# Altium PCB Rules for Pad и Via.PcbDoc
Units mm, origin at the board's own origin, x right, y up, seen from the top; angles counter-clockwise.
Board outline 50 x 31 mm, 2 copper layers (Top Layer, Top, Bottom Layer, Bottom); 31 components, 20 nets, 93 pads, 35 vias.
Unrouted connection lines stored in the file: 31.
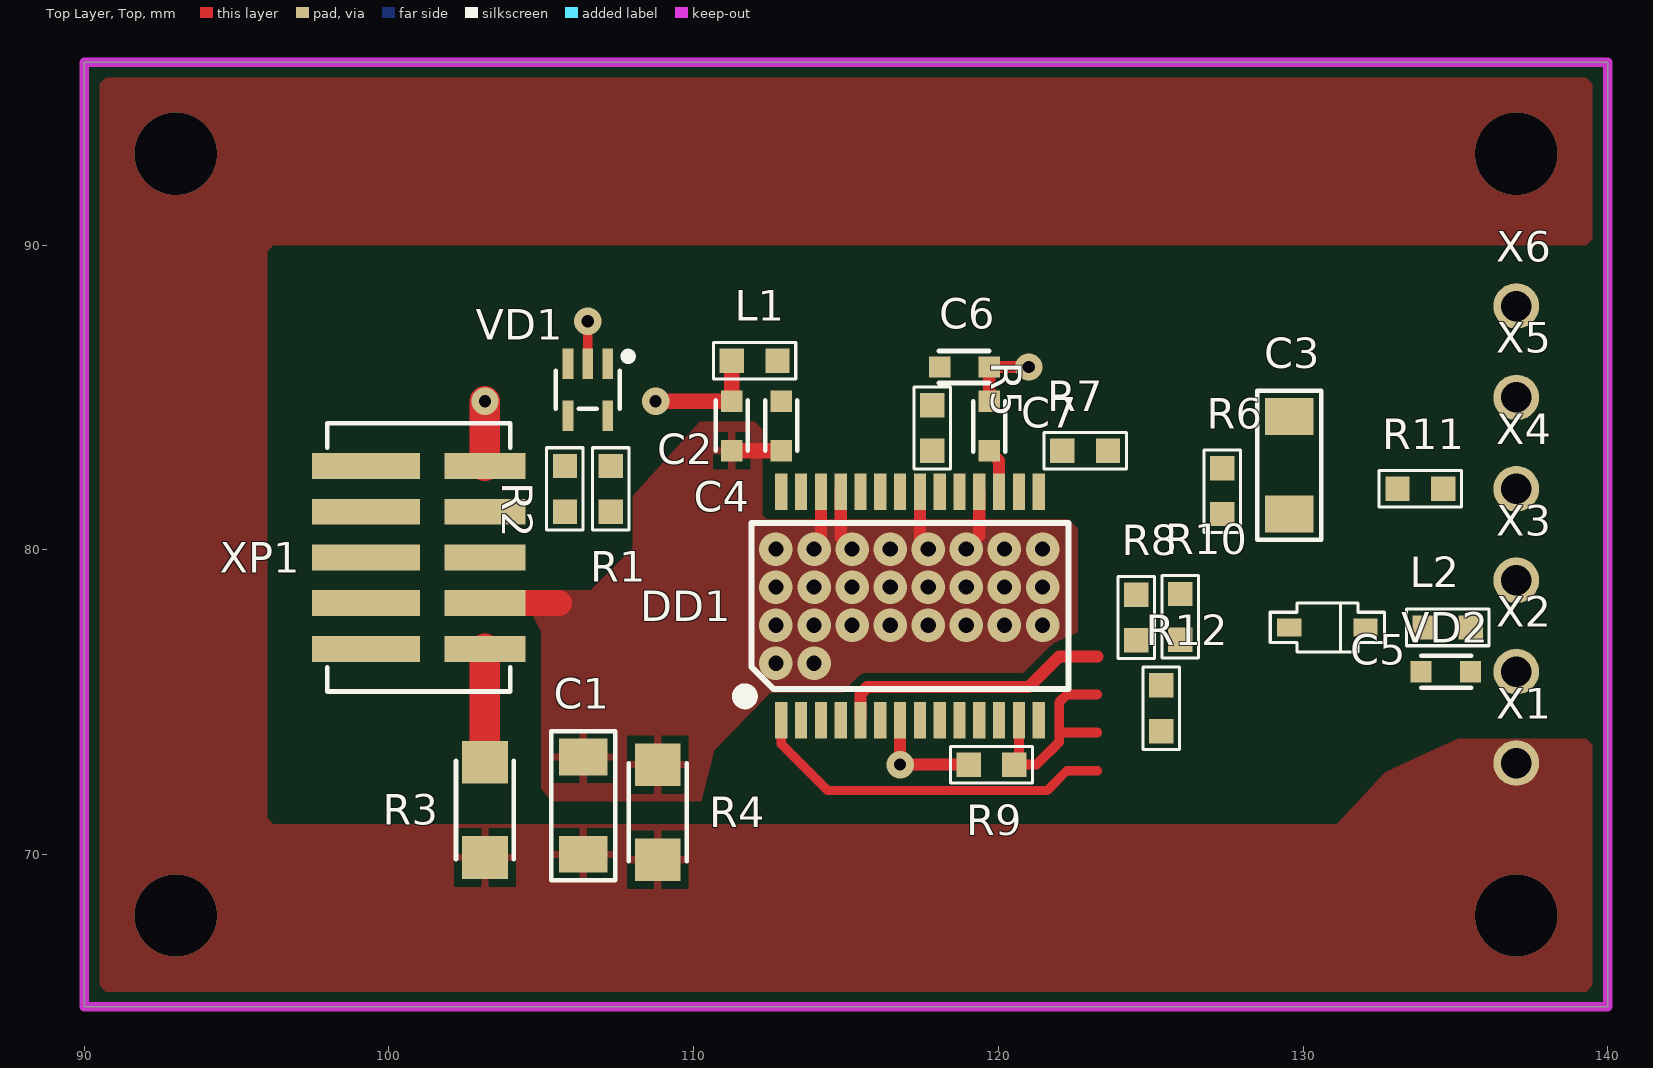
[diagram p0: Top Layer, Top view]
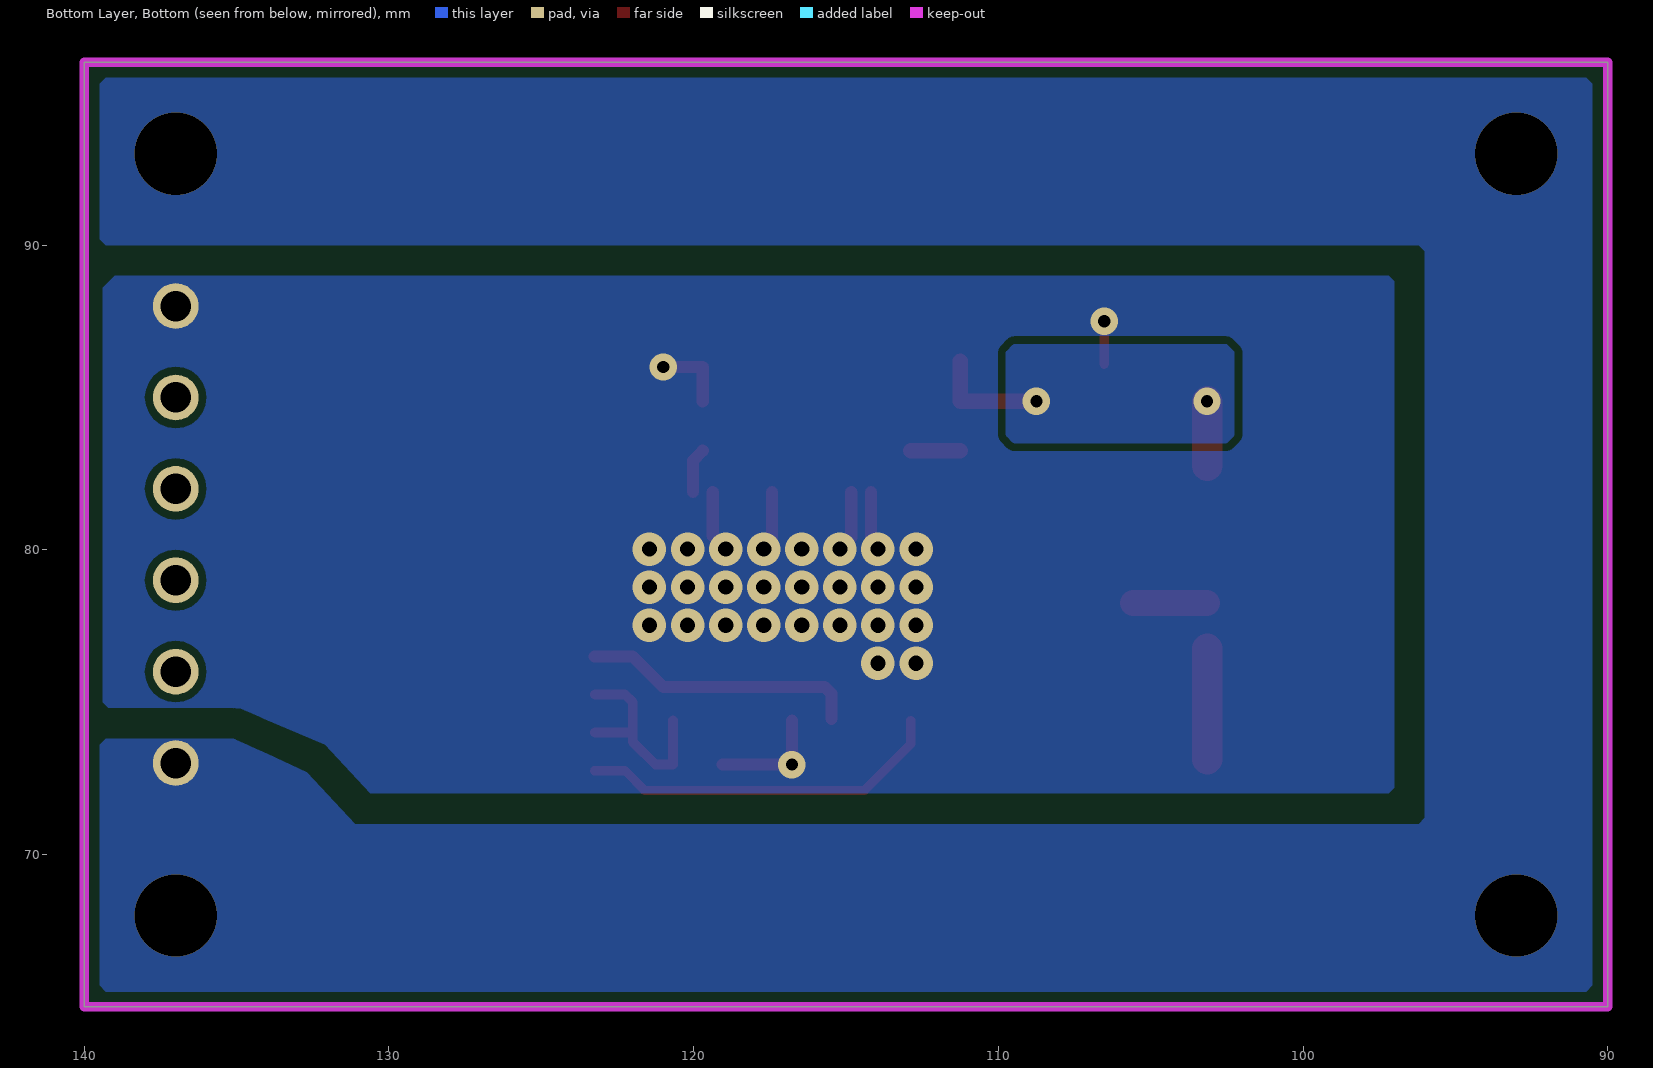
[diagram p1: Bottom Layer, Bottom view, seen from below]

## Layer stack, top to bottom
Top Solder, Top Mask: solder mask 0.0102, Solder Resist, Dk 3.5
Top Layer, Top: signal copper 0.0356
Dielectric 1: dielectric 0.32, FR-4, Dk 4.8
Bottom Layer, Bottom: signal copper 0.0356
Bottom Solder, Bot Mask: solder mask 0.0102, Solder Resist, Dk 3.5

## Board outline
90,65 140,65 140,96 90,96

## Design rules (kind name [scope] priority, off if disabled: settings)
Clearance ClearanceGNDvsCASE [(InNamedPolygon('Bottom Layer, Bottom-GND')) vs InNet('CASE')] p1: gap=1
Clearance ClearanceNetDA9_15 [(InNet('NetDA9_15') AND InPolygon)] p2: gap=0.15
Clearance ClearanceNetFU3 [(InNet('NetFU3_2') AND InPolygon)] p3: gap=0.15
Clearance ClearancePoly [InPolygon] p4: gap=0.25
Clearance Clearance_All [All] p5: gap=0.25
Clearance Clearance_Keepout [OnLayer('Keep-Out Layer')] p6: gap=1
DiffPairsRouting [All] p1: maxlimit=0.254 minlimit=0.254 mostfreqgap=0.254 toplayer_minwidth=0.254 toplayer_maxwidth=0.381 toplayer_prefwidth=0.381 bottomlayer_minwidth=0.254 bottomlayer_maxwidth=0.381 bottomlayer_prefwidth=0.381 maxuncoupledlength=12.7
Height [All] p1: minheight=0 maxheight=50 prefheight=12.7
HoleSize [All] p1 off: absolutevalues=TRUE maxlimit=10 minlimit=0.025 maxpercent=80.000 minpercent=20.000
HoleToHoleClearance [All] p1 off: gap=0.254 allowstackedmicrovias=FALSE
LayerPairs [All] p1 off: enforce=TRUE
MinimumSolderMaskSliver [All] p1 off: minsoldermaskwidth=0.15
NetAntennae [All] p1 off: netantennaetolerance=0
PlaneConnect [All] p1: planeconnectstyle=Direct reliefexpansion=0.508 reliefentries=4 reliefconductorwidth=0.254 reliefairgap=0.254
PolygonConnect PolygonConnect_RoundPad [HasRoundHole vs InNet('CASE')   OR InNet('GND')] p1: connectstyle=Direct reliefconductorwidth=0.254 reliefentries=4 polygonreliefangle="90 Angle" airgapwidth=0.254
PolygonConnect PolygonConnect_VIA [ViaDiameter vs InNet('CASE')   OR InNet('GND')    OR InNet('VUSB')] p2: connectstyle=Direct reliefconductorwidth=0.254 reliefentries=4 polygonreliefangle="90 Angle" airgapwidth=0.254
PolygonConnect PolygonConnect_Sq_Pads [All vs (InPadClass('All Pads'))] p3: connectstyle=Relief reliefconductorwidth=0.254 reliefentries=4 polygonreliefangle="90 Angle" airgapwidth=0.254
PolygonConnect [HasRoundHole] p4: connectstyle=Direct reliefconductorwidth=0.254 reliefentries=4 polygonreliefangle="90 Angle" airgapwidth=0.254
RoutingVias [All] p1: holewidth=0.4 width=0.8 viastyle="Through Hole" minholewidth=0.3 minwidth=0.6 maxholewidth=0.6 maxwidth=1
SilkToBoardRegionClearance [All] p1 off:
SilkToSilkClearance [All] p1 off: silktosilkclearance=0.254
SilkToSolderMaskClearance [IsPad] p1 off: minsilkscreentomaskgap=0.05 clearancetoexposedcopper=TRUE
SolderMaskExpansion [All] p1: expansion=0.05
Width [All] p1: maxlimit=5 minlimit=0.2 preferedwidth=0.35
18 further rules are at their usual default settings.

## Classes and differential pairs
component class "КСФТ.468351.006Э3 - Модуль преобразователя USB-UART": A B C1 C2 C3 C4 C5 C6 C7 DD1 GND L1 L2 R1 R2 R3 R4 R5 R6 R7 R8 R9 R10 R11 R12 VD1 VD2 XP1

## Components (designator, comment, footprint, x,y, rotation, side; value= is the part's Value field where it differs from the comment)
C1 "CAP-N-1206" SMD_1206_CAP 106.375,71.6 r270 top
C2 "CAP-N-0603" SMD_0603_CAP 111.25,83.25 r90 top
C3 "CAP-N-1206" SMD_1206_CAP 129.55,82.775 r90 top
C4 "CAP-N-0603" SMD_0603_CAP 112.875,83.25 r90 top
C5 "CAP-N-0603" SMD_0603_CAP 133.875,76 r0 top
C6 "CAP-N-0603" SMD_0603_CAP 119.7,86 r180 top
C7 "CAP-N-0603" SMD_0603_CAP 119.7,84.875 r270 top
DD1 "FT232RL" SSOP-28 112.875,74.4 r180 top
L1 "L_0603" SMD_0603_IND 112,86.2 r270 top
L2 "L_0603" SMD_0603_IND 134.75,77.45 r270 top
R1 "R_0603" SMD_0603_RES 107.275,82 r0 top
R2 "R_0603" SMD_0603_RES 105.775,82 r0 top
R3 "R_1206" SMD_1206_RES 103.15,73.025 r270 top (schematic designator R11)
R4 "R_1206" SMD_1206_RES 108.825,72.95 r270 top (schematic designator R12)
R5 "R_0603" SMD_0603_RES 117.825,84 r0 top
R6 "R_0603" SMD_0603_RES 127.35,81.925 r180 top
R7 "R_0603" SMD_0603_RES 122.85,83.25 r90 top
R8 "R_0603" SMD_0603_RES 124.533,77.778 r0 top
R9 "R_0603" SMD_0603_RES 119.775,72.95 r90 top
R10 "R_0603" SMD_0603_RES 125.975,77.8 r0 top
R11 "R_0603" SMD_0603_RES 133.85,82 r270 top
R12 "R_0603" SMD_0603_RES 125.35,74.8 r0 top
VD1 "SP0504BAJT" SC70-5 106.525,86.1 r180 top
VD2 "BAT165" SOD-323_BAT165(Primary) 130.8,77.45 r270 top
X1 "MH_H1.0xP1.5" MH_H1.0xP1.5 137,73 r180 top
X2 "MH_H1.0xP1.5" MH_H1.0xP1.5 137,76 r180 top
X3 "MH_H1.0xP1.5" MH_H1.0xP1.5 137,79 r180 top
X4 "MH_H1.0xP1.5" MH_H1.0xP1.5 137,82 r180 top
X5 "MH_H1.0xP1.5" MH_H1.0xP1.5 137,85 r180 top
X6 "MH_H1.0xP1.5" MH_H1.0xP1.5 137,88 r180 top
XP1 "87438-0543" Molex87437 99.25,82.75 r0 top

## Footprints (in the part's own frame and the unit in brackets; to place one, negate y for a bottom-side part, rotate by r counter-clockwise, add the part's x,y. Pads: shape width x height; smd on the part's side, far side on the other; paste and mask are expansions set on the pad)
MH_H1.0xP1.5 [mm]
  round 1.5 hole 1: 1(0,0)
Molex87437 [mm] "1.50mm (0.059\") Pitch Wire-to-Board Header 87437 Horizontal"
  rect 3.55x0.85 smd: 1(0,0) 2(0,-1.5) 3(0,-3) 4(0,-4.5) 5(0,-6)
  rect 2.65x0.85 smd: 1(3.9,0) 2(3.9,-1.5) 3(3.9,-3) 4(3.9,-4.5) 5(3.9,-6)
  silkscreen extent -1.27,-7.4 4.72,1.4
SC70-5 [mm]
  rect 0.35x1 smd: 1(-0.65,0) 2(0,0) 3(0.65,0) 4(0.65,1.7) 5(-0.65,1.7)
  silkscreen extent -1.45,-0.37 1.05,1.48, body extent -1.07,-0.32 1.08,2.03, height 1
SMD_0603_CAP [mm]
  rect 0.7x0.7 smd: 1(0,0) 2(1.625,0)
  silkscreen extent 0,-0.53 1.65,0.53, body extent 0,-0.4 1.6,0.4, height 0.55
SMD_0603_IND [mm]
  rect 0.8x0.8 smd: 1(0,-0.75) 2(0,0.75)
  silkscreen extent -0.6,-1.35 0.6,1.35, body extent -0.4,-0.8 0.4,0.8, height 0.9
SMD_0603_RES [mm]
  rect 0.8x0.8 smd: 1(0,-0.75) 2(0,0.75)
  silkscreen extent -0.6,-1.35 0.6,1.35, body extent -0.4,-0.8 0.4,0.8, height 0.9
SMD_1206_CAP [mm]
  rect 1.2x1.6 smd: 1(-1.6,0) 2(1.6,0)
  silkscreen extent -2.45,-1.05 2.45,1.05, body extent -1.6,-0.8 1.6,0.8, height 1.5
SMD_1206_RES [mm]
  rect 1.4x1.5 smd: 1(0,0) 2(3.125,0)
  silkscreen extent -0.05,-0.95 3.17,0.95, body extent 0,-0.8 3.2,0.8, height 0.65
SOD-323_BAT165(Primary) [mm]
  rect 0.6x0.8 smd: A(0,-1.25) C(0,1.25)
  silkscreen extent -0.8,-1.88 0.8,1.88, body extent -0.63,-0.85 0.63,0.85, height 1.1
SSOP-28 [mm]
  rect 0.4x1.2 smd: 1(0,0) 2(-0.65,0) 3(-1.3,0) 4(-1.95,0) 5(-2.6,0) 6(-3.25,0) 7(-3.9,0) 8(-4.55,0) 9(-5.2,0) 10(-5.85,0) 11(-6.5,0) 12(-7.15,0) 13(-7.8,0) 14(-8.45,0) 15(-8.45,-7.5) 16(-7.8,-7.5) 17(-7.15,-7.5) 18(-6.5,-7.5) 19(-5.85,-7.5) 20(-5.2,-7.5) 21(-4.55,-7.5) 22(-3.9,-7.5) 23(-3.25,-7.5) 24(-2.6,-7.5) 25(-1.95,-7.5) 26(-1.3,-7.5) 27(-0.65,-7.5) 28(0,-7.5)
  silkscreen extent -9.43,-6.48 1.39,-0.59, body extent -9.43,-7.73 0.97,0.23, height 1.95

## Part data
DD1: "USB to UART converter"
VD1: "Surface Mount TVS Diode Array"
XP1: "1.50mm (0.059\") Pitch Wire-to-Board Header 87437 Horizontal"

## Via types
v1: diameter 1.1, hole 0.5, Top Layer, Top to Bottom Layer, Bottom, 26 vias
v2: diameter 0.9, hole 0.4, Top Layer, Top to Bottom Layer, Bottom, 5 vias
v3: diameter 2.7, hole 2.7, Top Layer, Top to Bottom Layer, Bottom, 4 vias

## Nets (pads, with @x,y where several pads share a name; then routed paths per layer and width w, separated by ;. In a path a pad name is that pad's centre, name@x,y a point inside that pad or via, vN(x,y) a via of type N, cw(c..) or ccw(c..) an arc to the next point about the centre after c; other vN are vias at no path point)
3V3OUT: C7.2 DD1.17 R7.2 | length 1.5
  Top Layer, Top w0.4: C7.2 120.025,82.925 DD1.17
CASE: C1.2 R3.2 R4.2 X1.1
  other v3: 93,68 137,68 93,93 137,93
DM: DD1.16 R1.2 VD1.1
DP: DD1.15 R2.2 VD1.3
GND: C1.1 C2.1 C3.2 C4.1 C5.1 C6.1 C7.1 DD1.7 DD1.18 DD1.21 DD1.25 DD1.26 R4.1 R8.2 R9.2 VD1.2 X6.1 XP1.4@103.15,78.25 | length 17.7
  Top Layer, Top w0.32: VD1.2 v2@106.525,87.425
  Top Layer, Top w0.4: v1@114.175,80.25 DD1.26 ; v1@114.825,80.4 DD1.25 ; DD1.7 v2(116.775,72.95) R9.2 R9.2@119.05,72.95 ; v1@117.425,80.3 DD1.21 ; 119.375,80.45 DD1.18 ; C7.1 C6.1 v2(121,86)
  Top Layer, Top w0.5: C2.1 C4.1
  Top Layer, Top w0.85: XP1.4@103.15,78.25 105.575,78.25
  other v1: 112.7,76.275 113.95,76.275 112.7,77.525 113.95,77.525 115.2,77.525 116.45,77.525 117.7,77.525 118.95,77.525 120.2,77.525 121.45,77.525 112.7,78.775 113.95,78.775 115.2,78.775 116.45,78.775 117.7,78.775 118.95,78.775 120.2,78.775 121.45,78.775 112.7,80.025 113.95,80.025 115.2,80.025 116.45,80.025 117.7,80.025 118.95,80.025 120.2,80.025 121.45,80.025
  other v2: 106.525,87.5
NetL2_1: L2.1 VD2.C
NetR1_1: R1.1 XP1.2@103.15,81.25
NetR2_1: R2.1 XP1.3@103.15,79.75
NetR3_1: R3.1 XP1.5@103.15,76.75 | length 3.6
  Top Layer, Top w1: R3.1@103.15,73.125 XP1.5@103.15,76.75
R\E\S\E\T\: C6.2 DD1.19 R5.2
RX: R10.2 X3.1
RXD: DD1.5 R8.1 R10.1 | length 9.1
  Top Layer, Top w0.4: DD1.5@115.475,74.45 115.475,75.275 115.7,75.5 121,75.5 122,76.5 123.25,76.5
T/R\: R12.2 X5.1
TX: R11.2 X4.1
TXD: DD1.1 R11.1 | length 12.1
  Top Layer, Top w0.3: DD1.1 112.875,73.625 114.4,72.1 121.6,72.1 122.25,72.75 123.25,72.75
TXEN: DD1.13 R9.1 R12.1 | length 7
  Top Layer, Top w0.32: DD1.13 120.675,72.95 121.255,72.95 122,73.695 122,74 ; 123.25,74 122,74 ; 123.25,75.25 122.25,75.25 122,75 122,74
VCC: C3.1 C4.2 DD1.20 L1.2 R5.1 R6.2 VD2.A
VCC1: C5.2 L2.2 X2.1
VCCIO: DD1.4 R6.1 R7.1
VUSB: C2.2 L1.1 VD1.5 XP1.1@103.15,82.75 | length 6
  Top Layer, Top w0.5: v2(108.75,84.875) C2.2 L1.1
  Top Layer, Top w1: XP1.1@103.15,82.75 v2(103.15,84.875)
pads on no net: DD1.2 DD1.3 DD1.6 DD1.8 DD1.9 DD1.10 DD1.11 DD1.12 DD1.14 DD1.22 DD1.23 DD1.24 DD1.27 DD1.28 VD1.4 XP1.1@99.25,82.75 XP1.2@99.25,81.25 XP1.3@99.25,79.75 XP1.4@99.25,78.25 XP1.5@99.25,76.75

## Polygon pours and split planes (outlines as drawn)
VUSB on Bottom Layer, Bottom "Bottom Overlay-No Net" (solid, pour order 10): 102.25,86.5 102.5,86.75 109.5,86.75 109.75,86.5 109.75,83.75 109.5,83.5 102.5,83.5 102.25,83.75
GND on Bottom Layer, Bottom "Bottom Layer, Bottom-GND" (solid, pour order 5): 97,72.2 97.2,72 130.6,72 132.1,73.6 134.9,74.8 139.2,74.8 139.4,75 139.4,88.6 139,89 97.2,89 97,88.8
CASE on Bottom Layer, Bottom "Bottom Overlay-No Net" (solid, pour order 7): 139.3,95.5 90.7,95.5 90.5,95.3 90.5,65.7 90.7,65.5 139.3,65.5 139.5,65.7 139.5,73.6 139.3,73.8 135.1,73.8 133.991,73.303 132.7,72.7 131.1,71 96.2,71 96,71.2 96,89.8 96.2,90 139.3,90 139.5,90.2 139.5,95.3
CASE on Top Layer, Top "Bottom Overlay-No Net" (solid, pour order 6): 139.3,95.5 90.7,95.5 90.5,95.3 90.5,65.7 90.7,65.5 139.3,65.5 139.5,65.7 139.5,73.6 139.3,73.8 135.1,73.8 133.991,73.303 132.7,72.7 131.1,71 96.2,71 96,71.2 96,89.8 96.2,90 139.3,90 139.5,90.2 139.5,95.3
GND on Top Layer, Top "Bottom Overlay-No Net" (solid, remove dead copper, pour order 8): 101.825,78.675 101.825,77.825 104.725,77.825 105,77.3 105,72.15 105.35,71.75 110.25,71.75 110.675,73.425 112.5,75.3 114.9,75.3 115.075,75.475 115.175,75.6 115.35,75.775 115.525,75.9 115.675,75.925 120.8,75.925 121.8,76.925 122.6,77.3 122.6,80.7 122.3,81 112.4,81 112.25,81.15 112.25,83.95 112,84.2 110.2,84.2 108,81.75 108,80.05 106.625,78.675

## Keep-outs
Keep-Out Layer, Board:
  the board outline again, w0.32

## Silkscreen, mask and mechanical layers (free items; w line width, h text height)
Top Solder, Top Mask:
  region: 134,71 134,65.5 139.5,65.5 139.5,71
  region: 96,65.5 96,71 90.5,71 90.5,65.5
  region: 96,90 96,95.5 90.5,95.5 90.5,90
  region: 139.5,90 139.5,95.5 134,95.5 134,90
Bottom Solder, Bot Mask:
  region: 134,71 134,65.5 139.5,65.5 139.5,71
  region: 96,65.5 96,71 90.5,71 90.5,65.5
  region: 96,90 96,95.5 90.5,95.5 90.5,90
  region: 139.5,90 139.5,95.5 134,95.5 134,90